# Altium PCB PCB2.Stm32.PcbDoc
Units mm, origin at the board's own origin, x right, y up, seen from the top; angles counter-clockwise.
Board outline 78.1 x 99.31 mm, 2 copper layers (Top Layer, Bottom Layer); 22 components, 36 nets, 100 pads, 0 vias.
Unrouted connection lines stored in the file: 4.
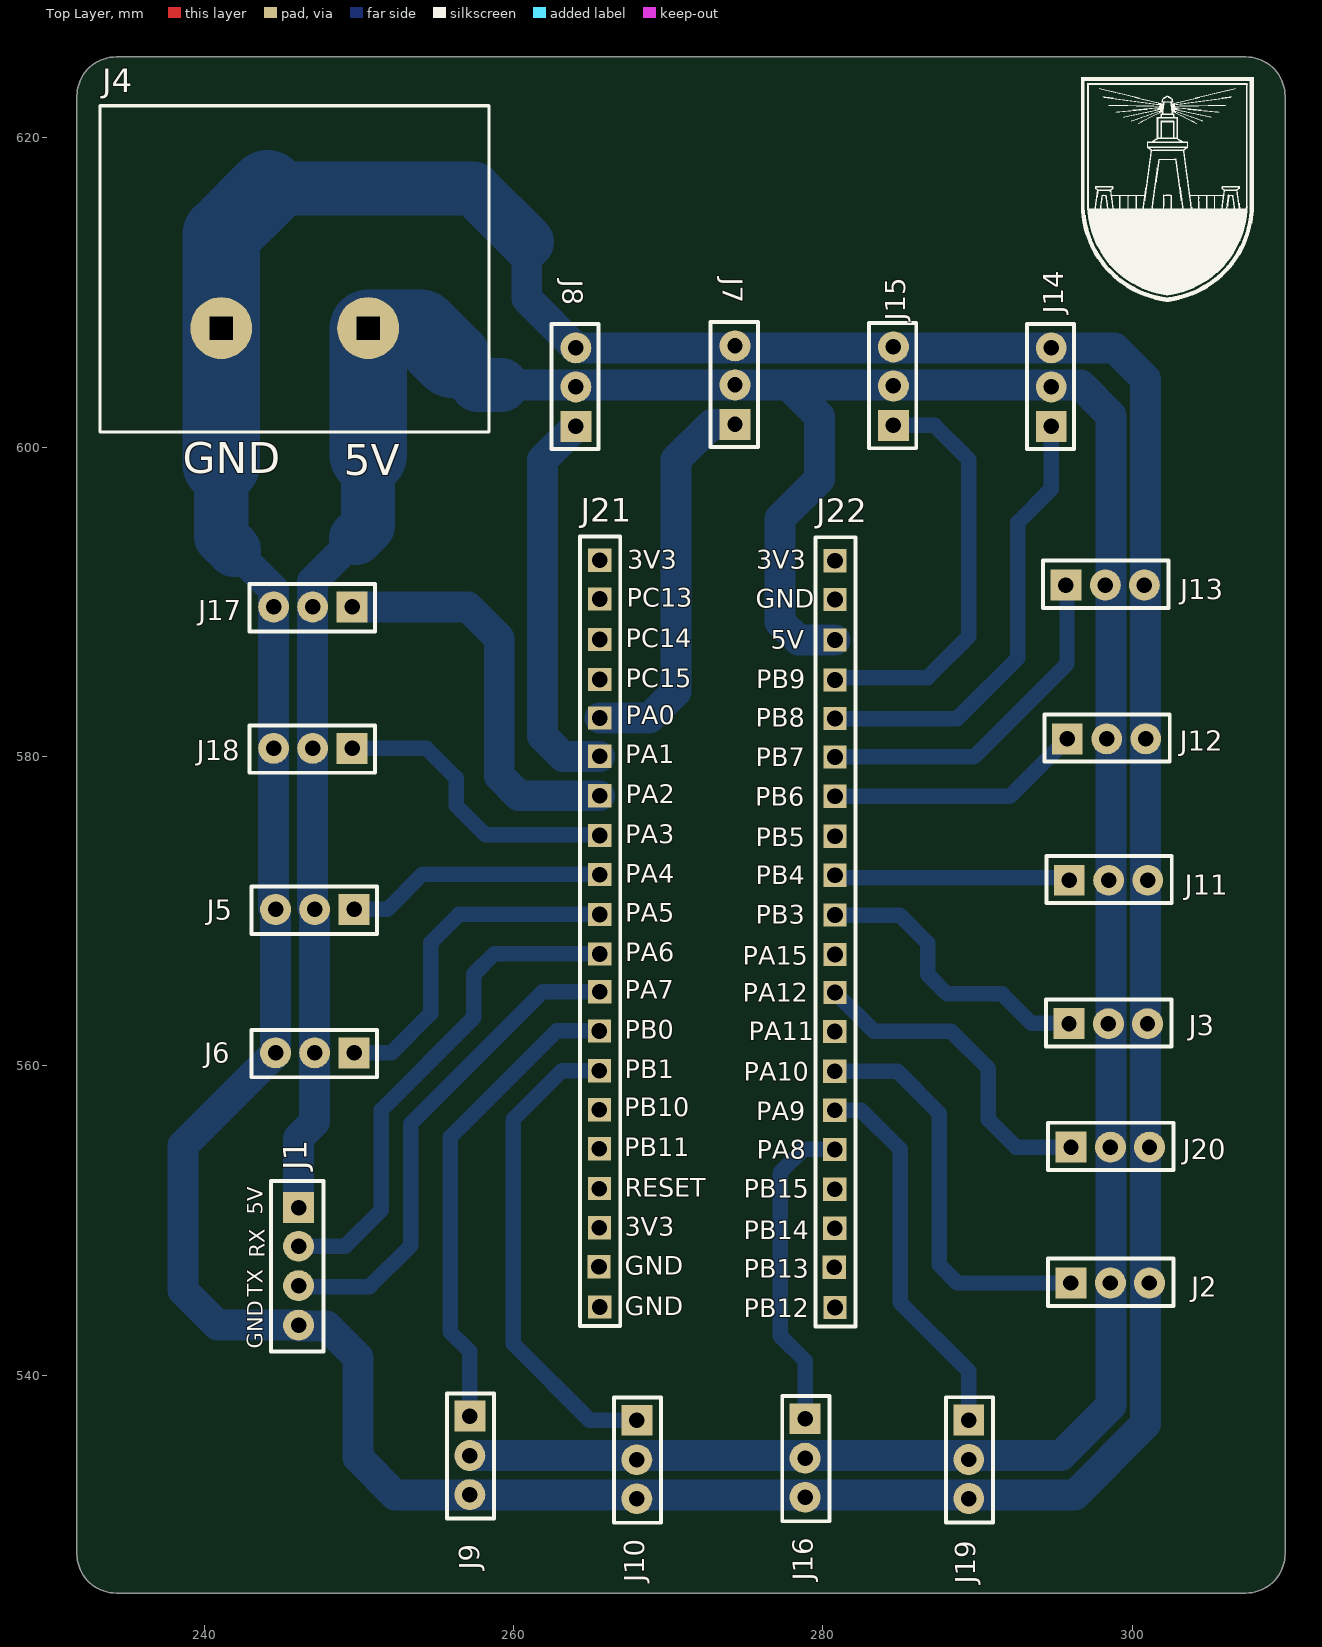
[diagram p0: Top Layer view]
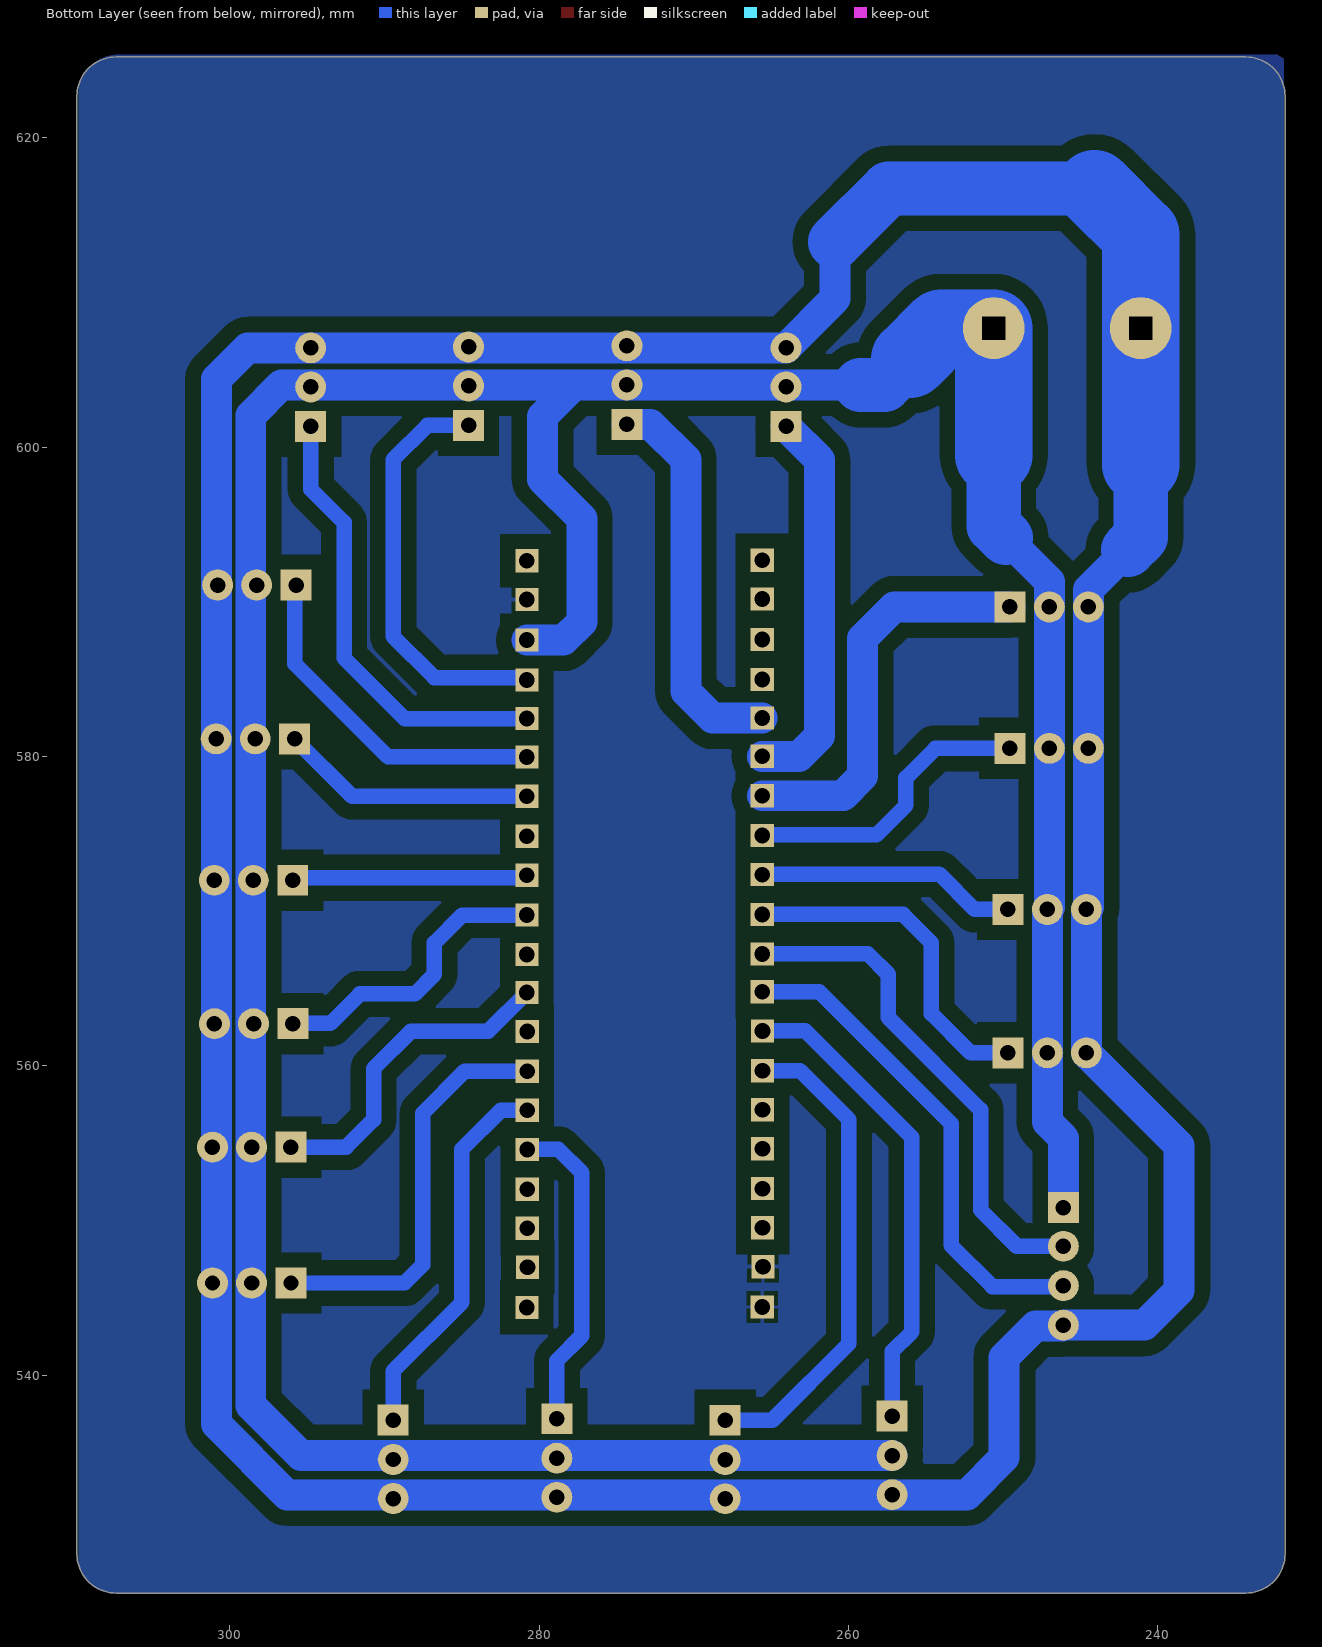
[diagram p1: Bottom Layer view, seen from below]
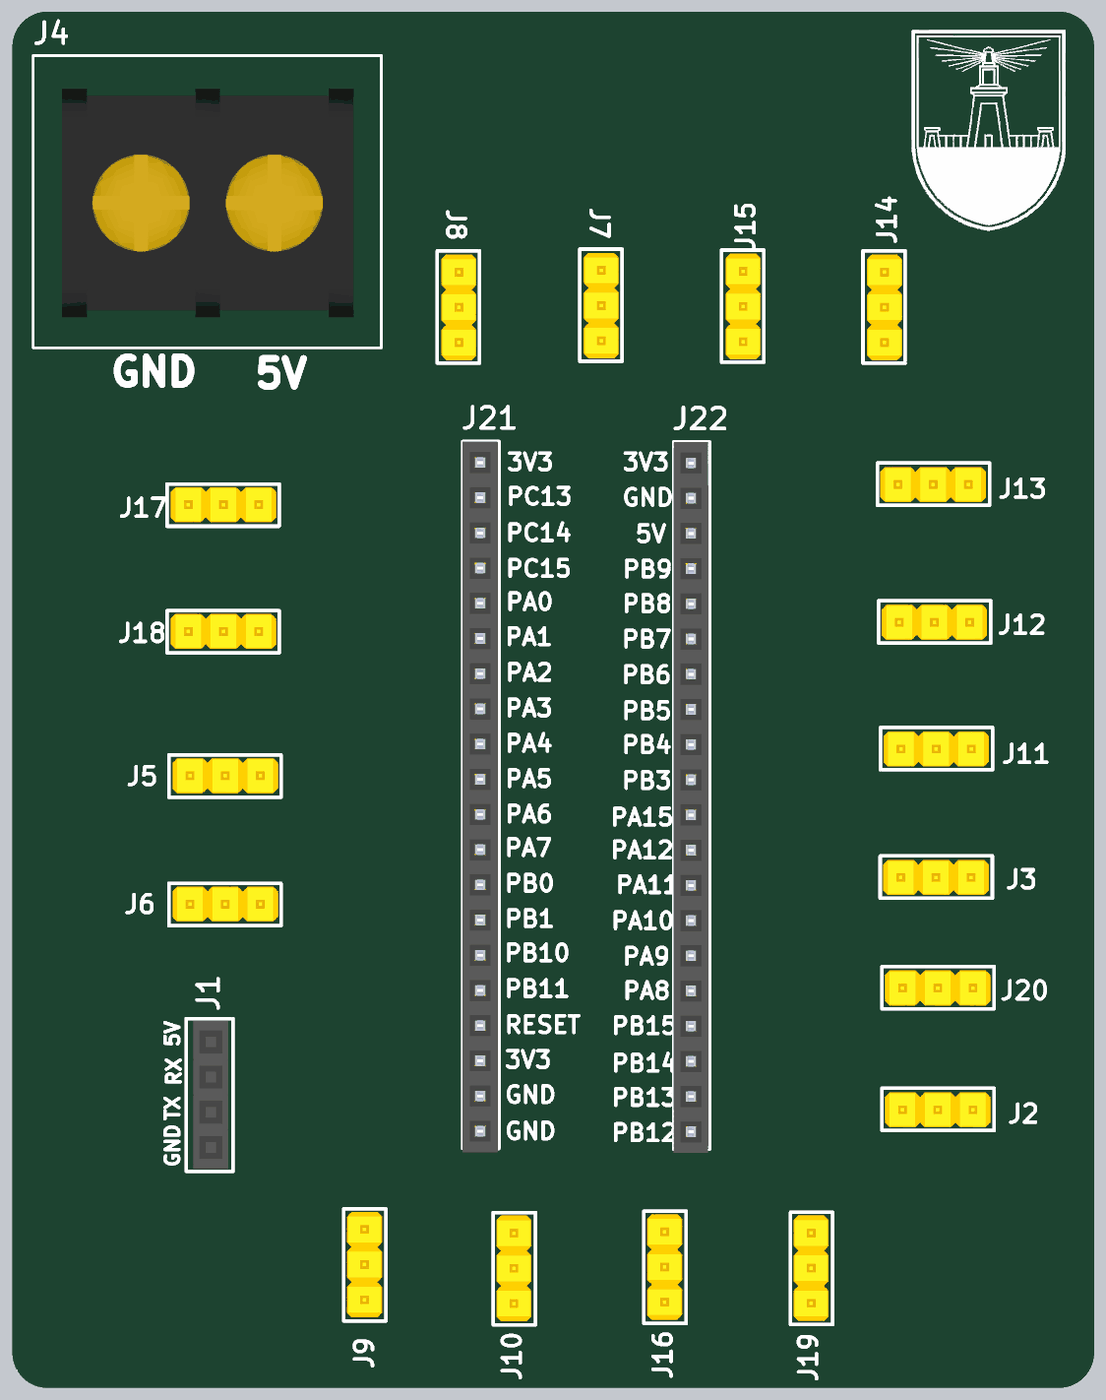
[diagram p2: 3D render of the assembled board from above, using the file's embedded part models]

## Layer stack, top to bottom
Top Solder: solder mask 0.0102, Solder Resist, Dk 3.5
Top Layer: signal copper 0.0356
Dielectric 1: dielectric 0.32, FR-4, Dk 4.8
Bottom Layer: signal copper 0.0356
Bottom Solder: solder mask 0.0102, Solder Resist, Dk 3.5

## Board outline
231.775,528.447 231.775,622.681 cw(c234.315,622.681) 234.315,625.221 307.34,625.221 cw(c307.34,622.681) 309.88,622.681 309.88,528.447 cw(c307.34,528.447) 307.34,525.907 234.315,525.907 cw(c234.315,528.447)

## Design rules (kind name [scope] priority, off if disabled: settings)
Clearance [All] p1: gap=1 ignorepadtopadclearanceinfootprint=FALSE
PolygonConnect [All] p1: connectstyle=Relief reliefconductorwidth=0.254 reliefentries=4 polygonreliefangle="90 Angle" airgapwidth=0.254
RoutingVias [All] p1: holewidth=0.711 width=1.27 viastyle="Through Hole" minholewidth=0.711 minwidth=1.27 maxholewidth=0.711 maxwidth=1.27
SolderMaskExpansion [All] p1: expansion=0.102 istentingtop=FALSE
Width [All] p1: maxlimit=10 minlimit=0.1 preferedwidth=0.5
30 further rules are at their usual default settings.

## Components (designator, comment, footprint, x,y, rotation, side; value= is the part's Value field where it differs from the comment)
J1 "Pin headers 4P" "connector (4 pin)" 246.105,547.055 r90 top
J2 "Pin headers 3P" "connector (3 pin)" 298.59,545.954 r180 top
J3 "Pin headers 3P" "connector (3 pin)" 298.463,562.718 r180 top
J4 "con 2P" "con 2P" 245.854,611.162 r180 top
J5 "Pin headers 3P" "connector (3 pin)" 247.142,570.103 r0 top
J6 "Pin headers 3P" "connector (3 pin)" 247.142,560.832 r0 top
J7 "Pin headers 3P" "connector (3 pin)" 274.32,604.012 r270 top
J8 "Pin headers 3P" "connector (3 pin)" 264.033,603.885 r270 top
J9 "Pin headers 3P" "connector (3 pin)" 257.175,534.797 r90 top
J10 "Pin headers 3P" "connector (3 pin)" 267.97,534.528 r90 top
J11 "Pin headers 3P" "connector (3 pin)" 298.478,571.989 r180 top
J12 "Pin headers 3P" "connector (3 pin)" 298.351,581.133 r180 top
J13 "Pin headers 3P" "connector (3 pin)" 298.261,591.076 r180 top
J14 "Pin headers 3P" "connector (3 pin)" 294.767,603.885 r270 top
J15 "Pin headers 3P" "connector (3 pin)" 284.562,603.946 r270 top
J16 "Pin headers 3P" "connector (3 pin)" 278.85,534.627 r90 top
J17 "Pin headers 3P" "connector (3 pin)" 247.015,589.661 r0 top
J18 "Pin headers 3P" "connector (3 pin)" 247.015,580.517 r0 top
J19 "Pin headers 3P" "connector (3 pin)" 289.433,534.543 r90 top
J20 "Pin headers 3P" "connector (3 pin)" 298.592,554.736 r180 top
J21 "Pin headers 20P" "connector (20pin) - duplicate" 265.55,568.553 r0 top
J22 "Pin headers 20P" "connector (20pin) - duplicate" 280.767,568.515 r0 top

## Footprints (in the part's own frame and the unit in brackets; to place one, negate y for a bottom-side part, rotate by r counter-clockwise, add the part's x,y. Pads: shape width x height; smd on the part's side, far side on the other; paste and mask are expansions set on the pad)
"con 2P" [mm]
  round 4 hole 1.5 square: 1(-4.75,3.475) 2(4.75,3.475)
  silkscreen extent -12.55,-10.9 12.57,10.2, body extent -10.55,-8.5 10.5,8, height 18.5
"connector (3 pin)" [mm]
  rect 2x2 hole 1 mask+0.09: 1(2.55,0)
  round 2 hole 1 mask+0.09: 2(0,0) 3(-2.525,0)
  silkscreen extent -4.08,-1.58 4.03,1.48, body extent -3.81,-1.29 3.81,1.25, height 9.5
"connector (4 pin)" [mm]
  rect 2x2 hole 1: 1(3.775,0)
  round 2 hole 1: 2(1.275,0) 3(-1.275,0) 4(-3.825,0)
  silkscreen extent -5.53,-1.6 5.5,1.78, body extent -5.33,-1.27 5.33,1.27, height 8.51
"connector (20pin) - duplicate" [mm]
  rect 1.5x1.5 hole 1.02: 1(0.025,24.125) 2(0.025,21.625) 3(0.025,19) 4(0.025,16.425) 5(0.025,13.925) 6(0.025,11.45) 7(0.025,8.9) 8(0.025,6.325) 9(0.025,3.8) 10(0.025,1.225) 11(0.025,-1.325) 12(0.025,-3.775) 13(0,-6.3) 14(0,-8.875) 15(0,-11.4) 16(0,-13.925) 17(0,-16.5) 18(0,-19.025) 19(-0.025,-21.55) 20(0.025,-24.15)
  silkscreen extent -1.25,-25.37 1.35,25.65, body extent -1.27,-25.65 1.27,25.65, height 8.52

## Part data
J1: "4P 2.54mm Plugin 1x4P Plugin,P=2.54mm Pin Headers ROHS", Manufacturer=ZHOURI, Manufacturer part Number=2.54-1*4, Supplier=LCSC, Supplier part Number=C5116483
J2 J3 J5 J6 J7 J8 J9 J10 J11 J12 J13 J14 J15 J16 J17 J18 J19 J20: "3A Straight Square Pins 3P -40℃~+105℃ 2.54mm Plugin Black 1x3P Plugin,P=2.54mm Pin Headers ROHS", Manufacturer="BOOMELE(Boom Precision Elec)", Manufacturer part Number=2.54-1*3P, Supplier=LCSC, Supplier part Number=C49257
J21 J22: "3A Direct Insert Policy 20P -40℃~+105℃ 2.54mm Single Row Black Brass 1x20P Plugin,P=2.54mm Pin Headers ROHS", Manufacturer="BOOMELE(Boom Precision Elec)", Manufacturer part Number=2.54-1*20P, Supplier=LCSC, Supplier part Number=C50981

## Nets (pads, with @x,y where several pads share a name; then routed paths per layer and width w, separated by ;. In a path a pad name is that pad's centre, name@x,y a point inside that pad or via, vN(x,y) a via of type N, cw(c..) or ccw(c..) an arc to the next point about the centre after c; other vN are vias at no path point)
+5: J1.1 J2.2 J3.2 J4.1 J5.2 J6.2 J7.2 J8.2 J9.2 J10.2 J11.2 J12.2 J13.2 J14.2 J15.2 J16.2 J17.2 J18.2 J19.2 J20.2 J22.3 | length 237.3
  Bottom Layer w2: J1.1 246.105,555.313 247.142,556.35 J6.2 J5.2 247.015,570.23 J18.2 J17.2 247.015,591.312 249.809,594.106 ; J9.2 295.402,534.797 298.64,538.035 298.64,602.043 296.672,604.012 277.749,604.012 ; 259.207,604.012 J7.2 277.749,604.012 ; J22.3 278.413,587.515 277.241,588.687 277.241,595.376 279.781,597.916 279.781,601.98 277.749,604.012
  Bottom Layer w3.5: 249.809,594.106 250.604,594.901 250.604,599.473 ; 256.032,605.663 257.683,604.012 259.207,604.012
  Bottom Layer w5: 250.604,599.473 J4.1 254.008,607.687 256.032,605.663
GND: J1.4 J2.3 J3.3 J4.2 J5.3 J6.3 J7.3 J8.3 J9.3 J10.3 J11.3 J12.3 J13.3 J14.3 J15.3 J16.3 J17.3 J18.3 J19.3 J20.3 J21.19 J21.20 J22.2 | length 281.4
  Bottom Layer w2: 241.935,593.344 244.49,590.789 J17.3 J18.3 244.49,570.23 J5.3 J6.3 238.633,554.848 238.633,545.465 240.868,543.23 J1.4 246.156,543.179 247.904,543.179 249.936,541.147 249.936,534.67 252.349,532.257 296.291,532.257 300.863,536.829 300.863,604.393 298.846,606.41 J14.3 J8.3 260.858,609.585 260.858,613.262
  Bottom Layer w3.5: 241.104,598.874 241.104,594.175 241.935,593.344 ; 244.094,616.712 257.408,616.712 260.858,613.262
  Bottom Layer w5: 241.104,598.874 J4.2 241.104,613.722 244.094,616.712
PA0: J7.1 J21.5 | length 25.4
  Bottom Layer w2: J21.5 268.788,582.478 270.51,584.2 270.51,599.186 272.786,601.462 J7.1
PA1: J8.1 J21.6 | length 25.2
  Bottom Layer w2: J8.1 261.874,599.176 261.874,581.326 263.196,580.003 J21.6
PA2: J17.1 J21.7 | length 26.3
  Bottom Layer w2: J17.1 257.048,589.661 259.08,587.629 259.08,578.739 260.366,577.453 J21.7
PA3: J18.1 J21.8 | length 19.4
  Bottom Layer w1: J18.1 254.381,580.517 256.286,578.612 256.286,576.834 258.191,574.929 265.524,574.929 J21.8
PA4: J5.1 J21.9 | length 16.8
  Bottom Layer w1: J5.1 251.841,570.103 254.127,572.389 265.539,572.389 J21.9
PA5: J6.1 J21.10 | length 22.3
  Bottom Layer w1: J6.1 252.095,560.832 254.635,563.372 254.635,567.944 256.469,569.778 J21.10
PA6: J1.2 J21.11 | length 32.7
  Bottom Layer w1: J1.2 249.118,548.33 251.46,550.672 251.46,557.149 257.429,563.118 257.429,565.912 258.745,567.228 J21.11
PA7: J1.3 J21.12 | length 32
  Bottom Layer w1: J1.3 246.166,545.719 250.698,545.719 253.365,548.386 253.365,556.26 261.883,564.778 J21.12
PA8: J16.1 J22.16 | length 20.7
  Bottom Layer w1: J16.1 278.85,540.935 277.241,542.544 277.241,553.085 278.746,554.59 J22.16
PA9: J19.1 J22.15 | length 24.6
  Bottom Layer w1: J22.15 282.482,557.115 284.988,554.609 284.988,544.703 289.433,540.258 J19.1
PA10: J2.1 J22.14 | length 26.7
  Bottom Layer w1: J22.14 284.812,559.64 287.528,556.924 287.528,547.116 288.69,545.954 J2.1
PA11: J22.13
PA12: J20.1 J22.12 | length 21.3
  Bottom Layer w1: J22.12 283.303,562.229 288.29,562.229 290.703,559.816 290.703,556.514 292.481,554.736 J20.1
PA15: J22.11
PB0: J9.1 J21.13 | length 31
  Bottom Layer w1: J9.1 257.175,541.528 255.905,542.798 255.905,555.371 262.787,562.253 J21.13
PB1: J10.1 J21.14 | length 31.4
  Bottom Layer w1: J21.14 263.133,559.678 259.969,556.514 259.969,542.036 264.927,537.078 J10.1
PB3: J3.1 J22.10 | length 19.2
  Bottom Layer w1: J22.10 284.97,569.74 286.766,567.944 286.766,565.912 288.036,564.642 291.592,564.642 293.497,562.737 295.894,562.737 J3.1
PB4: J11.1 J22.9 | length 15.3
  Bottom Layer w1: J22.9 280.955,572.152 295.765,572.152 J11.1
PB5: J22.8
PB6: J12.1 J22.7 | length 16.5
  Bottom Layer w1: J22.7 292.083,577.415 J12.1
PB7: J13.1 J22.6 | length 22.6
  Bottom Layer w1: J22.6 289.77,579.965 295.783,585.978 295.783,591.004 J13.1
PB8: J14.1 J22.5 | length 29.3
  Bottom Layer w1: J22.5 288.689,582.44 292.608,586.359 292.608,595.122 294.767,597.281 J14.1
PB9: J15.1 J22.4 | length 27
  Bottom Layer w1: J22.4 280.941,585.089 286.766,585.089 289.433,587.756 289.433,599.186 287.223,601.396 J15.1
PB10: J21.15
PB11: J21.16
PB12: J22.20
PB13: J22.19
PB14: J22.18
PB15: J22.17
PC13: J21.2
PC14: J21.3
PC15: J21.4
RESET: J21.17
VCC3.3: J21.1 J21.18 J22.1

## Polygon pours and split planes (outlines as drawn)
GND on Bottom Layer "GND_L02_P000" (solid, pour order 0): 231.855,625.093 231.855,528.447 ccw(c234.395,528.447) 234.395,525.907 307.467,525.907 ccw(c307.467,528.193) 309.753,528.193 309.753,622.808 ccw(c307.213,622.808) 307.213,625.348 232.283,625.348

## Silkscreen, mask and mechanical layers (free items; w line width, h text height)
Top Overlay:
  drawing of 2 lines, arcs and shapes, not listed
  text "GND" at 238.625,598.289 h2
  text "5V" at 249.039,598.162 h2
  text "3V3" at 267.342,592.144 h1.2
  text "3V3" at 275.696,592.144 h1.2
  text "PC13" at 267.317,589.669 h1.2
  text "GND" at 275.671,589.594 h1.2
  text "PC14" at 267.267,587.044 h1.2
  text "5V" at 276.621,586.969 h1.2
  text "PC15" at 267.267,584.469 h1.2
  text "PB9" at 275.696,584.419 h1.2
  text "PA0" at 267.267,582.069 h1.2
  text "PB8" at 275.671,581.919 h1.2
  text "PA1" at 267.217,579.544 h1.2
  text "PB7" at 275.646,579.369 h1.2
  text "PA2" at 267.242,576.969 h1.2
  text "PB6" at 275.621,576.794 h1.2
  text "PA3" at 267.217,574.394 h1.2
  text "PB5" at 275.646,574.194 h1.2
  text "PA4" at 267.217,571.844 h1.2
  text "PB4" at 275.646,571.744 h1.2
  text "PA5" at 267.217,569.294 h1.2
  text "PB3" at 275.646,569.169 h1.2
  text "PA6" at 267.217,566.744 h1.2
  text "PA15" at 274.821,566.519 h1.2
  text "PA7" at 267.192,564.319 h1.2
  text "PA12" at 274.821,564.144 h1.2
  text "PB0" at 267.192,561.744 h1.2
  text "PA11" at 275.196,561.644 h1.2
  text "PB1" at 267.192,559.194 h1.2
  text "PA10" at 274.871,559.044 h1.2
  text "PB10" at 267.167,556.719 h1.2
  text "PA9" at 275.696,556.469 h1.2
  text "PB11" at 267.167,554.144 h1.2
  text "PA8" at 275.721,553.994 h1.2
  text "RESET" at 267.192,551.544 h1.2
  text "PB15" at 274.896,551.469 h1.2
  text "5V" at 243.801,550.378 h1 r90
  text "3V3" at 267.192,549.019 h1.2
  text "PB14" at 274.896,548.767 h1.2
  text "RX" at 243.902,547.587 h1 r90
  text "GND" at 267.192,546.494 h1.2
  text "PB13" at 274.896,546.292 h1.2
  text "TX" at 243.802,545.062 h1 r90
  text "GND" at 267.192,543.869 h1.2
  text "PB12" at 274.896,543.742 h1.2
  text "GND" at 243.801,541.703 h1 r90
Mechanical 1:
  lines w0.1: 231.775,528.447 ccw(c234.315,528.447) 234.315,525.907 306.197,525.907 307.34,525.907 ccw(c307.34,528.447) 309.88,528.447 309.88,620.649 309.88,622.681 ccw(c307.34,622.681) 307.34,625.221 236.728,625.221 234.315,625.221 ccw(c234.315,622.681) 231.775,622.681 231.775,530.225 231.775,528.447